# Altium PCB GPS spacer bit.PcbDoc
Units mil, origin at the board's own origin, x right, y up, seen from the top; angles counter-clockwise.
Board outline 646.31 x 1021.5 mil, 2 copper layers (Top Layer, Bottom Layer); 3 components, 4 nets, 11 pads, 0 vias.
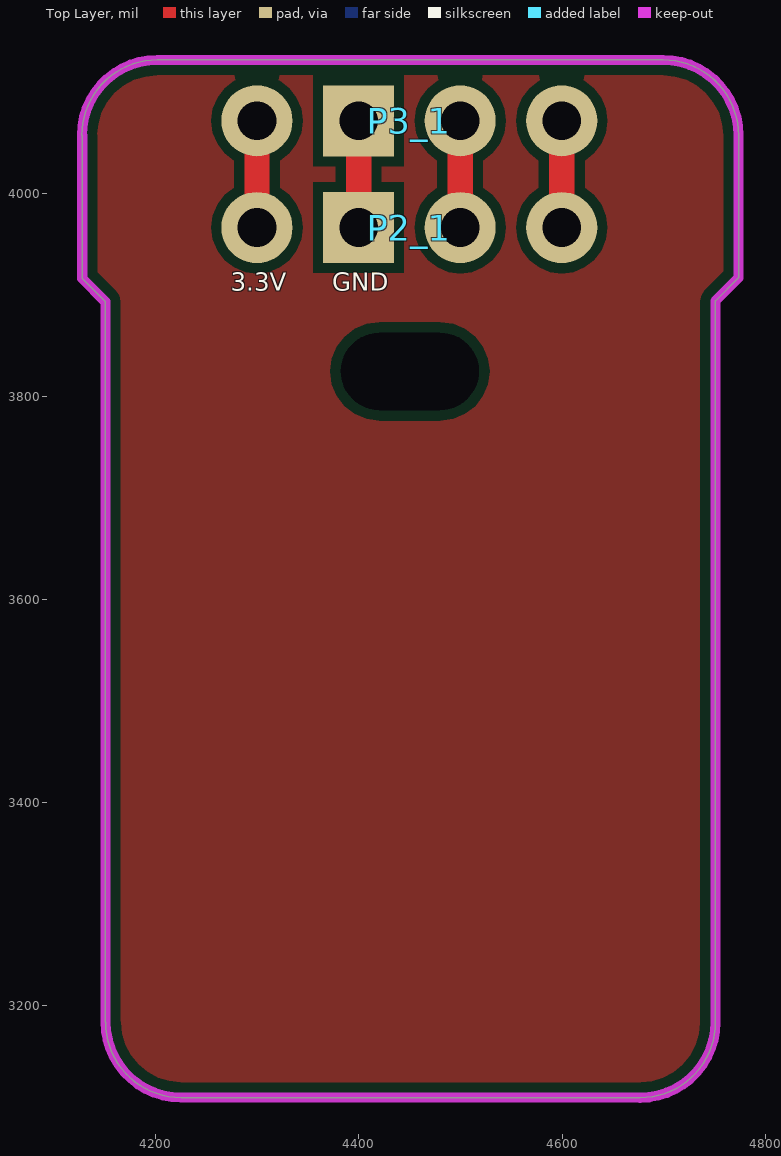
[diagram p0: Top Layer view]
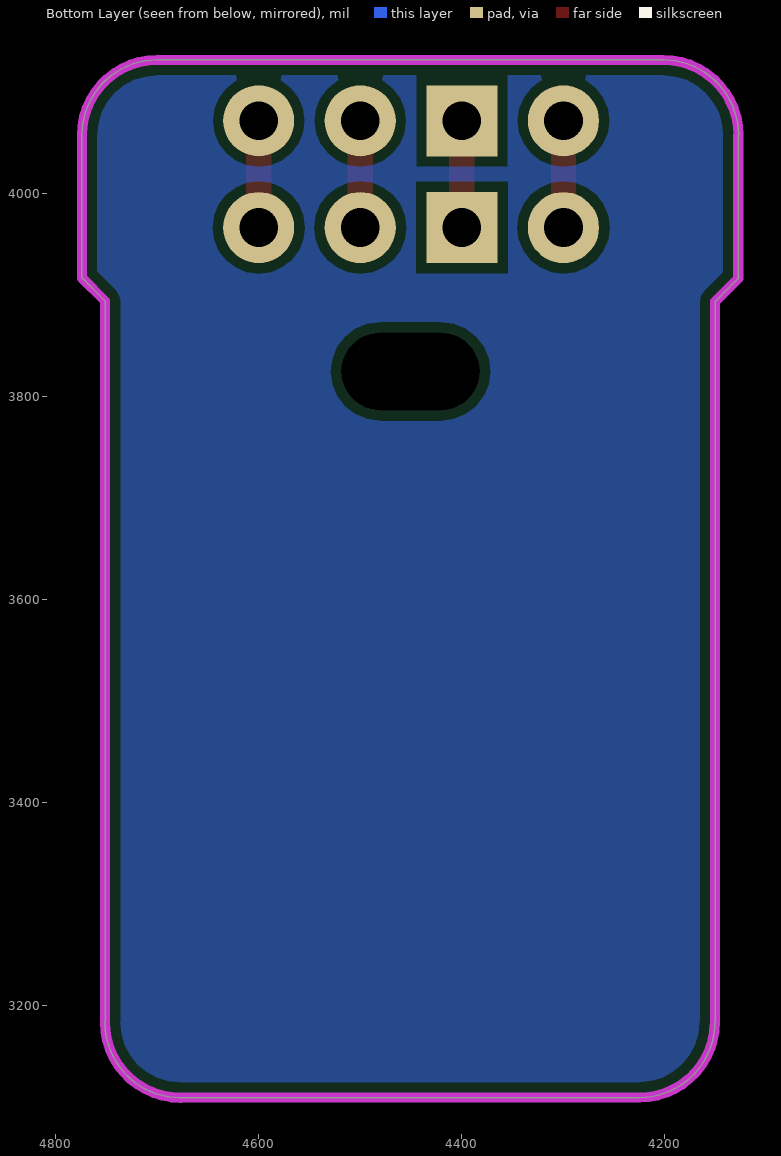
[diagram p1: Bottom Layer view, seen from below]

## Layer stack, top to bottom
Top Layer: signal copper 1.4
Dielectric: dielectric 12.6, FR-4, Dk 4.8
Bottom Layer: signal copper 1.4

## Board outline
4127.6,3916.01 4150.41,3893.2 4150.41,3184.2 4150.6,3184.2 ccw(c4224.91,3184.2) 4224.91,3109.89 4676.6,3109.89 4676.6,3109.7 ccw(c4676.6,3184.01) 4750.91,3184.01 4750.79,3184.01 4750.79,3893.89 4773.6,3916.7 4773.6,4056.89 ccw(c4699.29,4056.89) 4699.29,4131.2 4201.6,4131.2 ccw(c4201.6,4056.89) 4127.29,4056.89 4127.6,4056.89

## Design rules (kind name [scope] priority, off if disabled: settings)
Clearance [All] p1: gap=10
PolygonConnect [All] p1: connectstyle=Relief reliefconductorwidth=10 reliefentries=4 polygonreliefangle="90 Angle"
RoutingVias [All] p1: holewidth=28 width=50 viastyle="Through Hole" minholewidth=28 minwidth=50 maxholewidth=28 maxwidth=50
SilkscreenOverComponentPads [All] p1: minsilkscreentomaskgap=10
SolderMaskExpansion [All] p1: expansion=4
Width [All] p1: maxlimit=30 minlimit=10 preferedwidth=20 minimp=50.000000 maximp=50.000000 favimp=50.000000
27 further rules are at their usual default settings.

## Components (designator, comment, footprint, x,y, rotation, side; value= is the part's Value field where it differs from the comment)
P2 "Header 4" HDR1X4#1 3989,3668.5 r180 top
P2_1 "Header 4" HDR1X4#2 4599.6,3966.2 r180 top (schematic designator P2)
P3_1 "Header 4" HDR1X4#2 4599.6,4071.2 r180 top (schematic designator P2)

## Footprints (in the part's own frame and the unit in brackets; to place one, negate y for a bottom-side part, rotate by r counter-clockwise, add the part's x,y. Pads: shape width x height; smd on the part's side, far side on the other; paste and mask are expansions set on the pad)
HDR1X4#1 [mil] "Connector; Header; 4 Position"
HDR1X4#2 [mil] "Connector; Header; 4 Position"
  round 70 hole 38: 1(0,0) 2(100,0) 4(300,0)
  rect 70x70 hole 38: 3(200,0)

## Part data
P2 P2_1 P3_1: "Header, 4-Pin"

## Free pads (board coordinates)
  round 0 hole 65: 0(4450.1,3824.6)
  round 225 on Top Solder: 0(4452.6,3350.7)
  round 0 hole 76 slot 136 at 0 deg: 1(4450.1,3824.6)

## Nets (pads, with @x,y where several pads share a name; then routed paths per layer and width w, separated by ;. In a path a pad name is that pad's centre, name@x,y a point inside that pad or via, vN(x,y) a via of type N, cw(c..) or ccw(c..) an arc to the next point about the centre after c; other vN are vias at no path point)
1: P2_1.1 P3_1.1 | length 105
  Top Layer w25: P2_1.1 P3_1.1
2: P2_1.2 P3_1.2 | length 105
  Top Layer w25: P2_1.2 P3_1.2
3: P2_1.3 P3_1.3 | length 105
  Top Layer w25: P2_1.3 P3_1.3
4: P2_1.4 P3_1.4 | length 105
  Top Layer w25: P2_1.4 P3_1.4

## Polygon pours and split planes (outlines as drawn)
no net on Top Layer "Top Layer-No Net" (solid, pour order 2): 4127.6,3916.01 4150.41,3893.2 4150.41,3184.2 4150.6,3184.2 ccw(c4224.91,3184.2) 4224.91,3109.89 4676.6,3109.89 4676.6,3109.7 ccw(c4676.6,3184.01) 4750.91,3184.01 4750.79,3184.01 4750.79,3893.89 4773.6,3916.7 4773.6,4056.89 ccw(c4699.29,4056.89) 4699.29,4131.2 4201.6,4131.2 ccw(c4201.6,4056.89) 4127.29,4056.89 4127.6,4056.89
no net on Bottom Layer "Top Layer-No Net" (solid, pour order 5): 4127.6,3916.01 4150.41,3893.2 4150.41,3184.2 4150.6,3184.2 ccw(c4224.91,3184.2) 4224.91,3109.89 4676.6,3109.89 4676.6,3109.7 ccw(c4676.6,3184.01) 4750.91,3184.01 4750.79,3184.01 4750.79,3893.89 4773.6,3916.7 4773.6,4056.89 ccw(c4699.29,4056.89) 4699.29,4131.2 4201.6,4131.2 ccw(c4201.6,4056.89) 4127.29,4056.89 4127.6,4056.89

## Keep-outs
Keep-Out Layer:
  lines w10: 4127.29,4056.89 cw(c4201.6,4056.89) 4201.6,4131.2 4699.29,4131.2 cw(c4699.29,4056.89) 4773.6,4056.89 4773.6,3916.7 4750.79,3893.89 4750.79,3184.01 ; 4127.6,4056.89 4127.6,3916.01 4150.41,3893.2 4150.41,3184.2 ; 4150.6,3184.2 ccw(c4224.91,3184.2) 4224.91,3109.89 4676.6,3109.89 ; 4676.6,3109.7 ccw(c4676.6,3184.01) 4750.91,3184.01

## Silkscreen, mask and mechanical layers (free items; w line width, h text height)
Top Overlay:
  text "3.3V" at 4273.6,3898.2 h30
  text "GND" at 4373.6,3898.2 h30
Bottom Solder:
  rectangle: 4293.7,3701.2 4607.7,3786.2
  text ":)" at 4418.6,3526.7 h150 r270